# Altium PCB Radio_Controller.PcbDoc
Units mm, origin at the board's own origin, x right, y up, seen from the top; angles counter-clockwise.
Board outline 42 x 60 mm, 2 copper layers (Top Layer, Bottom Layer); 14 components, 13 nets, 66 pads, 4 vias.
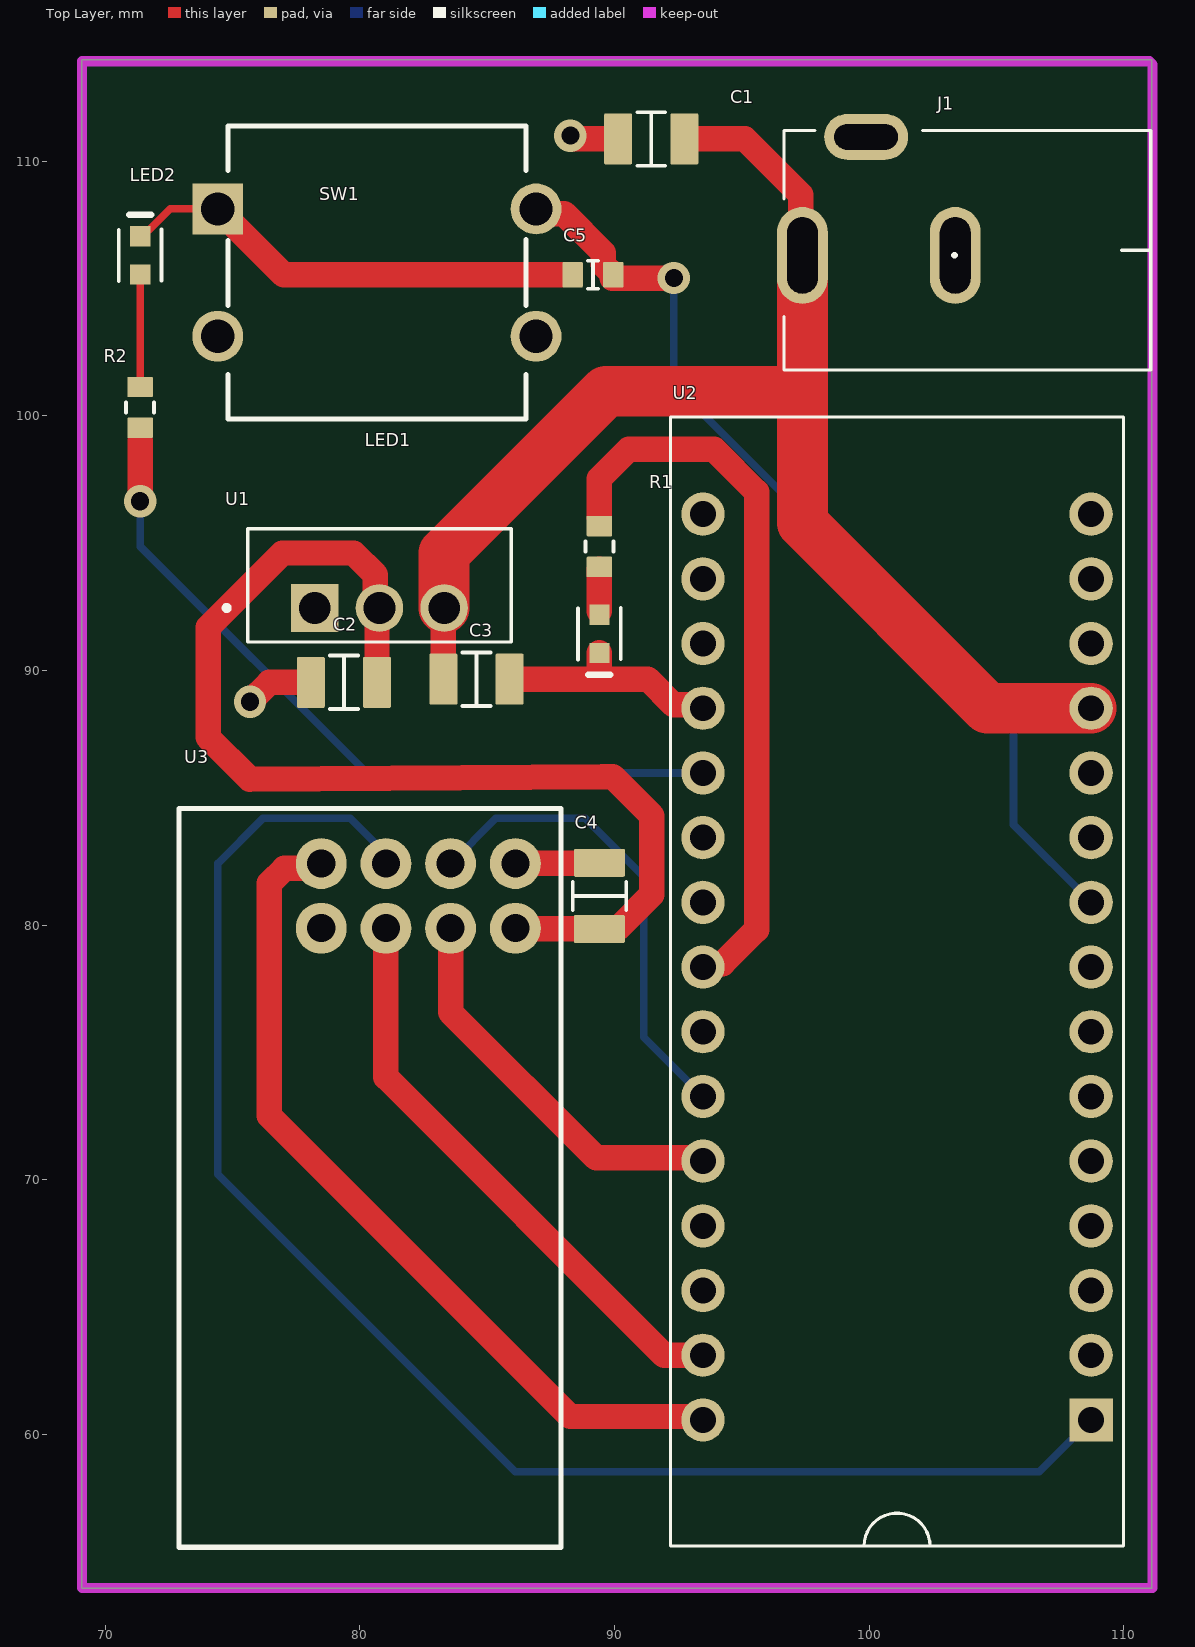
[diagram p0: Top Layer view]
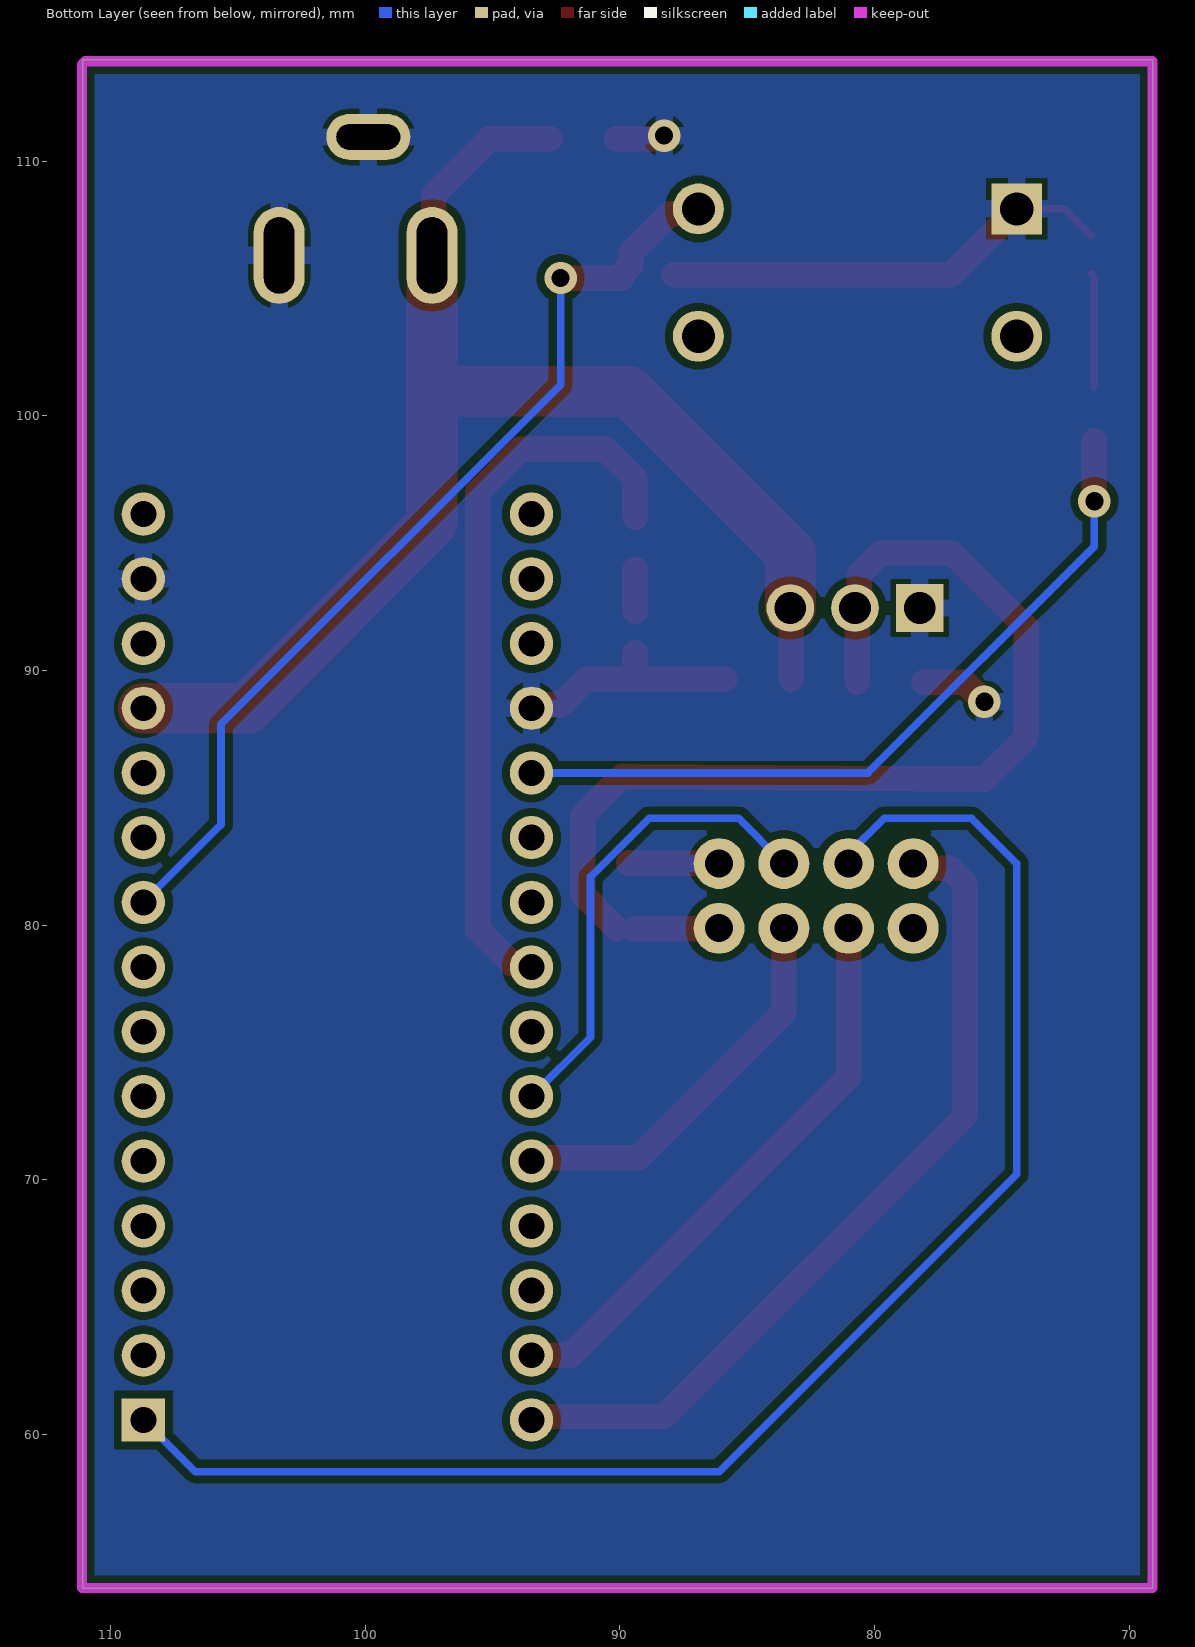
[diagram p1: Bottom Layer view, seen from below]
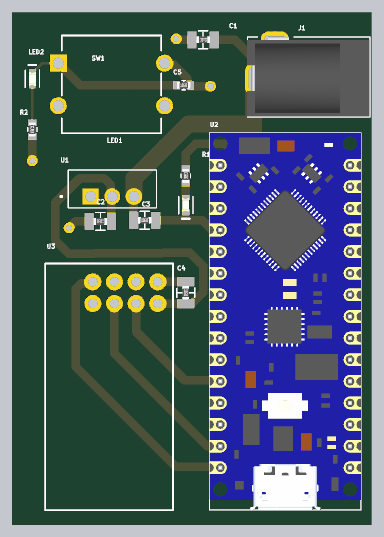
[diagram p2: 3D render of the assembled board from above, using the file's embedded part models]

## Layer stack, top to bottom
Top Solder: solder mask 0.0102, Solder Resist, Dk 3.5
Top Layer: signal copper 0.0356
Dielectric 1: dielectric 0.32, FR-4, Dk 4.8
Bottom Layer: signal copper 0.0356
Bottom Solder: solder mask 0.0102, Solder Resist, Dk 3.5

## Board outline
69.088,53.975 69.088,113.975 111.088,113.975 111.088,53.975

## Design rules (kind name [scope] priority, off if disabled: settings)
Clearance [All] p1: gap=0.3 ignorepadtopadclearanceinfootprint=FALSE
MinimumSolderMaskSliver [All] p1: minsoldermaskwidth=0.1
PolygonConnect [All] p1: connectstyle=Relief reliefconductorwidth=0.7 reliefentries=4 polygonreliefangle="90 Angle" airgapwidth=0.2
RoutingVias [All] p1: holewidth=0.711 width=1.27 viastyle="Through Hole" minholewidth=0.711 minwidth=1.27 maxholewidth=0.711 maxwidth=1.27
SilkToSilkClearance [All] p1: silktosilkclearance=0.15
SilkToSolderMaskClearance [IsPad] p1: minsilkscreentomaskgap=0.15 clearancetoexposedcopper=TRUE
SolderMaskExpansion [All] p1: expansion=0.04 istentingtop=FALSE
SupplyNets "Schematic Supply Nets_2" [InNet('GND')] p1: voltage=0.000
SupplyNets "Schematic Supply Nets_1" [InNet('+3.3')] p2: voltage=0.000
SupplyNets "Schematic Supply Nets" [InNet('+5')] p3: voltage=0.000
Width [All] p1: maxlimit=3 minlimit=0.2 preferedwidth=1
27 further rules are at their usual default settings.

## Components (designator, comment, footprint, x,y, rotation, side; value= is the part's Value field where it differs from the comment)
C1 "10uF" "CAP 1206" 91.44,110.871 r0 top
C2 "22uF" "CAP 1206" 79.375,89.535 r0 top
C3 "10uF" "CAP 1206" 84.582,89.662 r180 top
C4 "100uF" "CAP 1206" 89.408,81.153 r90 top
C5 "100nF" "CAP 0603" 89.154,105.537 r180 top
J1 "Power Jack" Power_Jack 97.378,106.299 r0 top value="CONN PWR JACK 2X5.5MM SOLDER"
LED1 "0603Gr" LED_0603 89.408,91.44 r270 top value=Green
LED2 "0603Gr" LED_0603 71.374,106.299 r90 top value=Green
R1 "100R" "RES 0603" 89.408,94.869 r270 top
R2 "100R" "RES 0603" 71.374,100.33 r90 top
SW1 "Button" Button 74.422,108.124 r0 top
U1 "Linear_Stabilizer" TO-220 80.772,93.345 r0 top
U2 "Arduino_NANO" MODULE_ABX00028 101.092,78.359 r90 top
U3 "NRF_24l01" NRF24L01 82.296,81.153 r270 top

## Footprints (in the part's own frame and the unit in brackets; to place one, negate y for a bottom-side part, rotate by r counter-clockwise, add the part's x,y. Pads: shape width x height; smd on the part's side, far side on the other; paste and mask are expansions set on the pad)
Button [mm]
  rect 2x2 hole 1.3: 1(0,0)
  round 2 hole 1.3: 2(12.5,0) 3(0,-5) 4(12.5,-5)
  silkscreen extent 0.4,-8.25 12.1,3.25
"CAP 0603" [mm] "Chip Resistor, 2-Leads, Body 1.60x0.80mm"
  rrect10% 0.8x1 smd: 1(-0.8,0) 2(0.8,0)
  silkscreen extent -0.2,-0.55 0.2,0.55, body extent -0.8,-0.4 0.8,0.4, height 0.45
"CAP 1206" [mm] "Chip Resistor, 2-Leads, Body 1.60x0.80mm"
  rrect10% 1.1x2 smd: 1(-1.3,0) 2(1.3,0)
  silkscreen extent -0.55,-1.05 0.55,1.05, body extent -0.8,-0.4 0.8,0.4, height 0.45
LED_0603 [mm]
  rect 0.8x0.8 smd: 1(-0.75,0) 2(0.75,0)
  silkscreen extent -1.02,-0.84 1.6,0.84, body extent -0.84,-0.41 0.76,0.39, height 0.55
MODULE_ABX00028 [mm]
  rect 1.7x1.7 / inner round 1.7 / far side rect 1.7x1.7 hole 1.016: 1(-17.78,-7.62)
  round 1.7 hole 1.016: 2(-15.24,-7.62) 3(-12.7,-7.62) 4(-10.16,-7.62) 5(-7.62,-7.62) 6(-5.08,-7.62) 7(-2.54,-7.62) 8(0,-7.62) 9(2.54,-7.62) 10(5.08,-7.62) 11(7.62,-7.62) 12(10.16,-7.62) 13(12.7,-7.62) 14(15.24,-7.62) 15(17.78,-7.62) 16(17.78,7.62) 17(15.24,7.62) 18(12.7,7.62) 19(10.16,7.62) 20(7.62,7.62) 21(5.08,7.62) 22(2.54,7.62) 23(0,7.62) 24(-2.54,7.62) 25(-5.08,7.62) 26(-7.62,7.62) 27(-10.16,7.62) 28(-12.7,7.62) 29(-15.24,7.62) 30(-17.78,7.62)
  silkscreen extent -22.73,-8.89 21.59,8.89, body extent -22.74,-8.89 21.59,8.89, height 6
NRF24L01 [mm]
  round 2 hole 1.1: 1(1.27,-3.81) 2(1.27,-1.27) 3(1.27,1.27) 4(1.27,3.81) 5(-1.27,3.81) 6(-1.27,1.27) 7(-1.27,-1.27) 8(-1.27,-3.81)
  silkscreen extent -3.43,-9.4 25.57,5.6
Power_Jack [mm]
  oval 2x3.8 hole 1.2 slot 3 at 90 deg: 1(0,0) 2(6,0)
  oval 3.3x1.8 hole 1 slot 2.5 at 0 deg: 3(2.5,4.65)
  silkscreen extent -0.72,-4.5 13.68,4.9, body extent -0.76,-4.45 13.64,4.95, height 11.49
"RES 0603" [mm] "Chip Resistor, 2-Leads, Body 1.60x0.80mm"
  rrect10% 0.8x1 smd: 1(-0.8,0) 2(0.8,0)
  silkscreen extent -0.2,-0.55 0.2,0.55, body extent -0.8,-0.4 0.8,0.4, height 0.45
TO-220 [mil] "TO254P1035X444X2115-3N)"
  rect 73.5x73.5 / inner round 73.5 / far side rect 73.5x73.5 hole 49: 1(-100,-35)
  round 73.5 hole 49: 2(0,-35) 3(100,-35)
  silkscreen extent -240,-88 204,88

## Part data
C1 C2 C3 C4 C5: library part Capacitor, "SMT Capacitor"
J1: library part "P_Power Jack", "Power Barrel Connector Jack 2.10mm ID (0.083\"), 5.50mm OD (0.217\") Through Hole, Right Angle", LCSC Part#=C136744, MFR Part #=PJ-102A, Digikey Link=https://www.digikey.com/product-detail/en/PJ-102A/CP-102A-ND/275425/?itemSeq=304982367, Type=Extended
LED1 LED2: library part LED_GREEN_0603, "LIGHT EMITTING DIODES (LED) GREEN 520~535NM 112~258MCD@20MA TOP VIEW 0603 ROHS", LCSC Part#=C72043, MFR Part #=19-217/GHC-YR1S2/3T, Type=Basic
R1 R2: library part Res, "Resistor", Ordered by=Subcon, Published=8-Jun-2000, Publisher="Altium Limited", Revision="July-2002: Re-released for DXP Platform."

## Via types
v1: diameter 1.27, hole 0.711, Top Layer to Bottom Layer, 4 vias

## Nets (pads, with @x,y where several pads share a name; then routed paths per layer and width w, separated by ;. In a path a pad name is that pad's centre, name@x,y a point inside that pad or via, vN(x,y) a via of type N, cw(c..) or ccw(c..) an arc to the next point about the centre after c; other vN are vias at no path point)
+3.3: C2.2 C4.1 U1.2 U3.4 | length 43.8
  Top Layer w1: C2.2 80.675,92.359 U1.2 80.606,92.622 80.606,93.765 79.756,94.615 76.962,94.615 74.041,91.694 74.041,87.376 75.681,85.736 89.51,85.837 89.931,85.837 90.224,85.544 91.462,84.306 91.462,81.203 C4.1@90.112,79.853 ; U3.4 86.121,79.868 89.393,79.868 C4.1
+5: C1.2 C3.2 J1.1 U1.3 U2.12 | length 54.1
  Top Layer w1: C3.2 U1.3@83.282,92.426 ; C1.2 95.123,110.871 97.319,108.675 97.319,106.358 J1.1
  Top Layer w2: U1.3 83.312,94.615 89.662,100.965 97.155,100.965 ; J1.1 97.378,100.965 97.378,95.789 104.648,88.519 U2.12
CE: U2.25 U3.6 | length 18.9
  Bottom Layer w0.3: U3.6 85.344,84.201 88.851,84.201 91.155,81.898 91.155,75.596 U2.25
CNS: U2.26 U3.3 | length 15.6
  Top Layer w1: U3.3 83.566,76.581 89.274,70.873 93.338,70.873 U2.26
GND: C1.1 C2.1 C3.1 C4.2 C5.2 J1.2 J1.3 LED1.2 LED2.2 SW1.1 U1.1 U2.14 U2.19 U3.5 | length 35.2
  Top Layer w0.3: LED2.2@71.501,107.073 72.552,108.124 SW1.1
  Top Layer w1: SW1.1 77.009,105.537 87.884,105.537 ; v1(75.692,88.773) 76.454,89.535 C2.1 ; C3.1 89.408,89.662 ; U3.5 86.121,82.438 89.647,82.438 C4.2@89.662,82.453 ; v1(88.265,110.998) 88.338,110.998 88.465,110.871 C1.1 ; LED1.2 89.408,89.662 ; U2.19 93.338,88.653 92.322,88.653 91.313,89.662 89.408,89.662
MISO: U2.30 U3.8 | length 33.4
  Top Layer w1: U3.8 78.295,82.232 77.04,82.232 76.454,81.646 76.454,72.517 88.258,60.713 93.338,60.713 U2.30
MOSI: U2.29 U3.2 | length 22.8
  Top Layer w1: U3.2 81.026,74.041 91.948,63.119 U2.29
NetC5_1: C5.1 SW1.2 U2.9 | length 38.1
  Top Layer w1: SW1.2 87.113,107.933 88.028,107.933 89.554,106.407 89.554,105.937 C5.1 ; C5.1@89.919,105.41 v1(92.329,105.41)
  Bottom Layer w0.3: v1(92.329,105.41) 92.329,101.219 105.664,87.884 105.664,83.947 U2.9
NetLED1_1: LED1.1 R1.2 | length 1.6
  Top Layer w1: LED1.1@89.408,92.329 R1.2@89.408,93.97
NetLED2_1: LED2.1 R2.2 | length 4.5
  Top Layer w0.3: R2.2 71.374,105.446 LED2.1@71.501,105.573
NetR1_1: R1.1 U2.23 | length 28.8
  Top Layer w1: R1.1@89.408,96.012 89.408,97.536 90.551,98.679 93.912,98.679 95.578,97.013 95.578,79.83 94.241,78.493 93.606,78.493 U2.23
NetR2_1: R2.1 U2.20 | length 29.9
  Top Layer w1: v1(71.374,96.647) 71.374,99.03
  Bottom Layer w0.3: v1(71.374,96.647) 71.374,94.869 80.264,85.979 U2.20
SCK: U2.1 U3.7 | length 60.5
  Bottom Layer w0.3: U3.7 81.026,82.804 79.629,84.201 76.2,84.201 74.422,82.423 74.422,70.231 86.106,58.547 106.68,58.547 U2.1
pads on no net: SW1.3 SW1.4 U2.2 U2.3 U2.4 U2.5 U2.6 U2.7 U2.8 U2.10 U2.11 U2.13 U2.15 U2.16 U2.17 U2.18 U2.21 U2.22 U2.24 U2.27 U2.28 U3.1

## Polygon pours and split planes (outlines as drawn)
GND on Bottom Layer "GND_L02_P000" (solid, remove dead copper, pour order 0): 14.668,146.05 16.7,144.018 171.513,144.018 171.513,27.051 168.974,29.591 13.399,29.591 13.399,127.254 7.175,133.477

## Keep-outs
Keep-Out Layer:
  lines w0.4: 69.088,53.975 69.088,113.919 110.998,113.919 111.125,113.792 111.125,53.975 69.088,53.975

## Silkscreen, mask and mechanical layers (free items; w line width, h text height)
Board_Outline:
  the board outline again, w0.254